# EAGLE board Main Board PCB v34 (EAGLE 9.7.0)
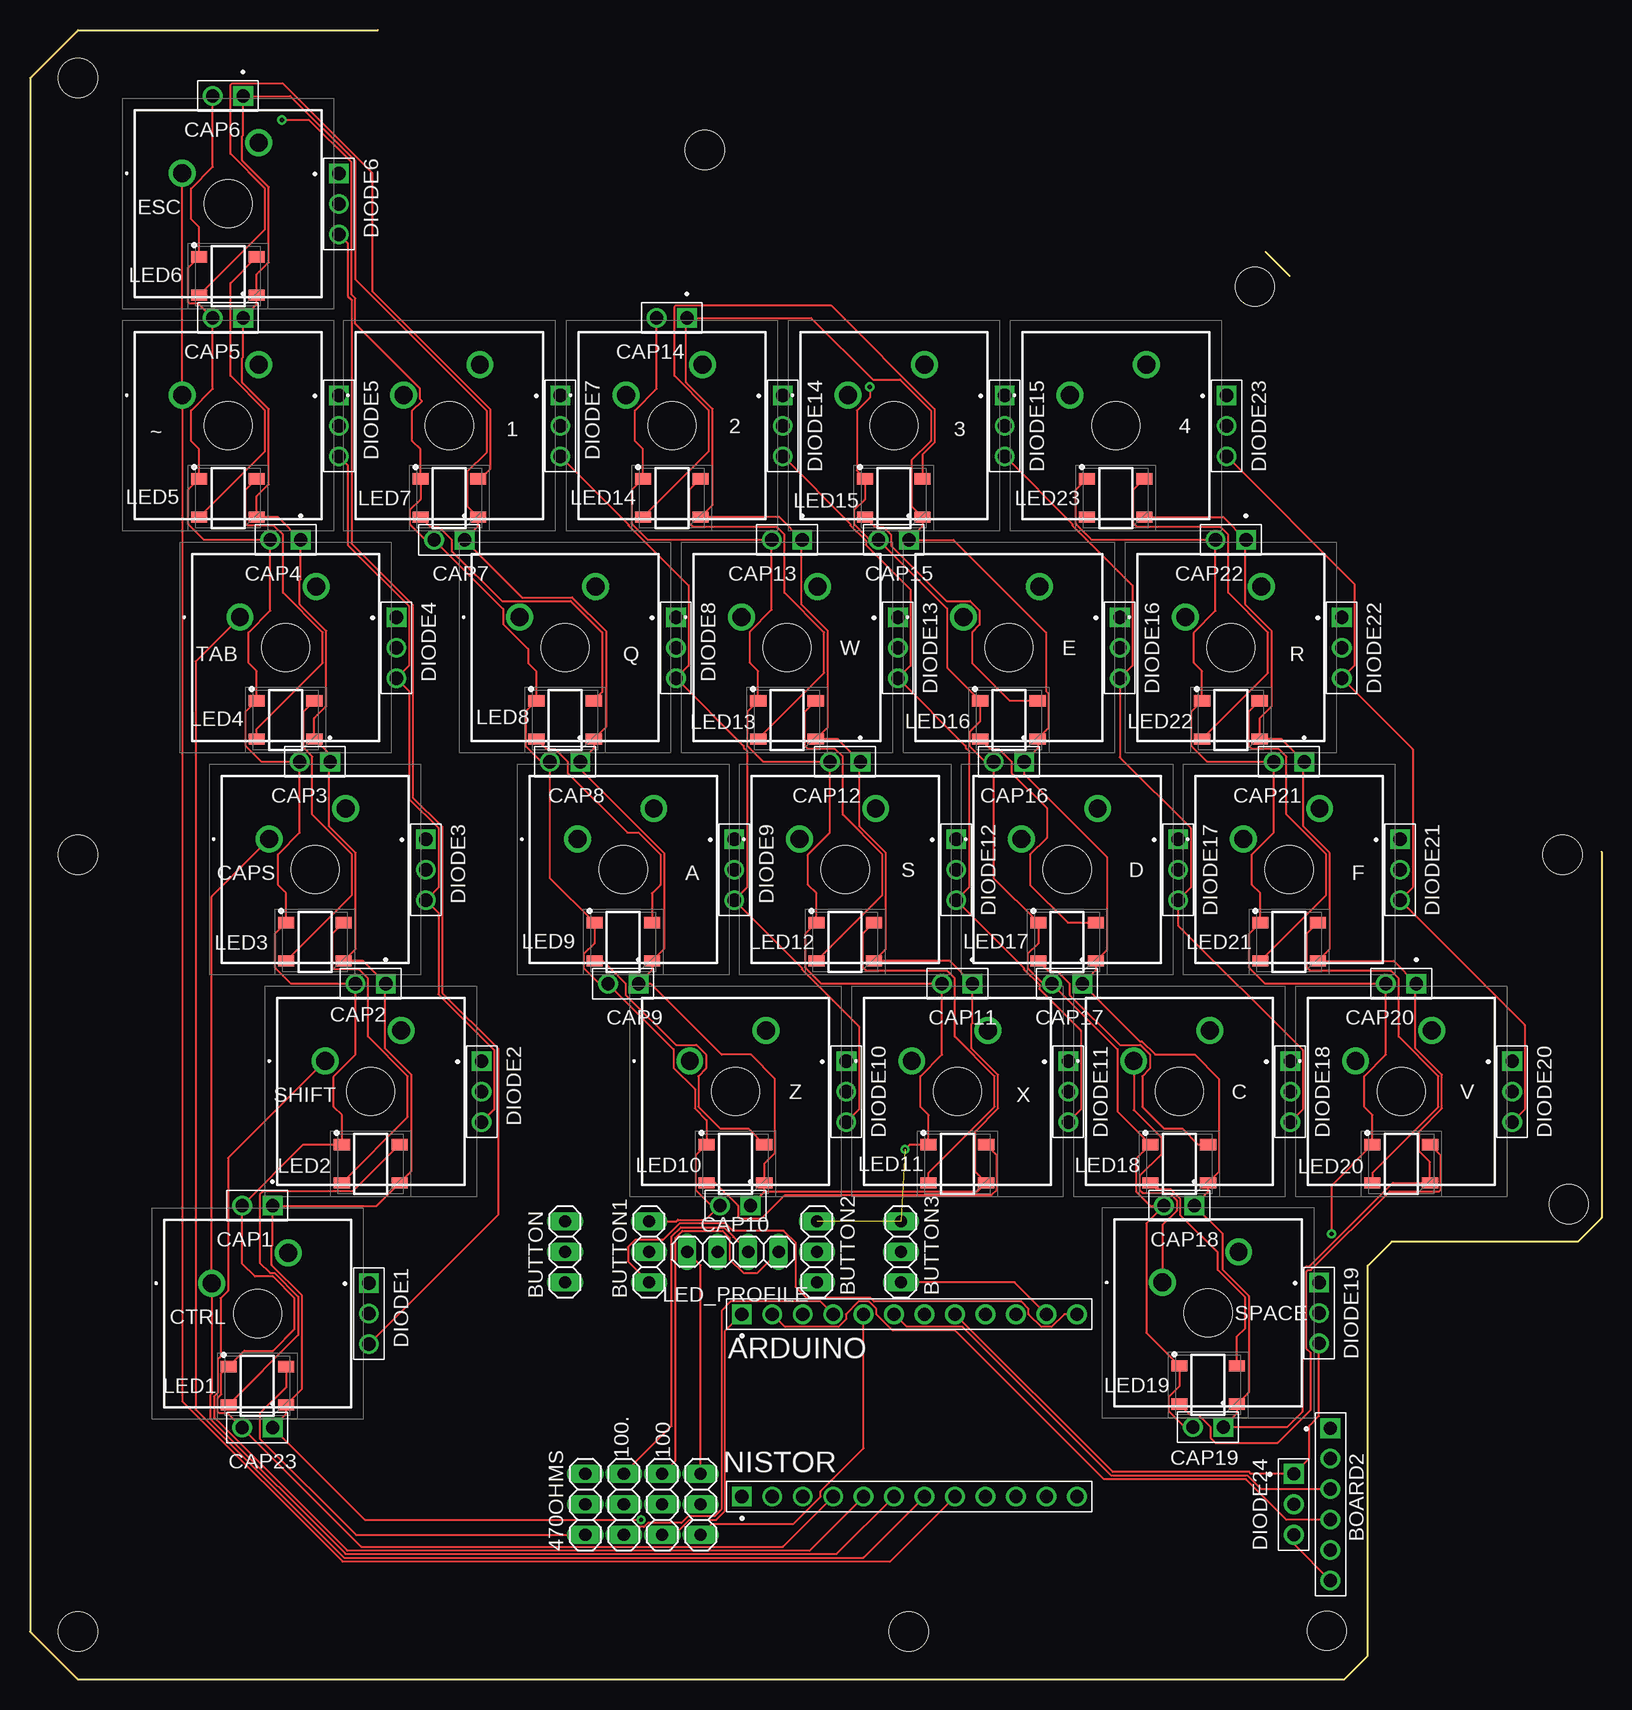
[diagram p0: board, top side]
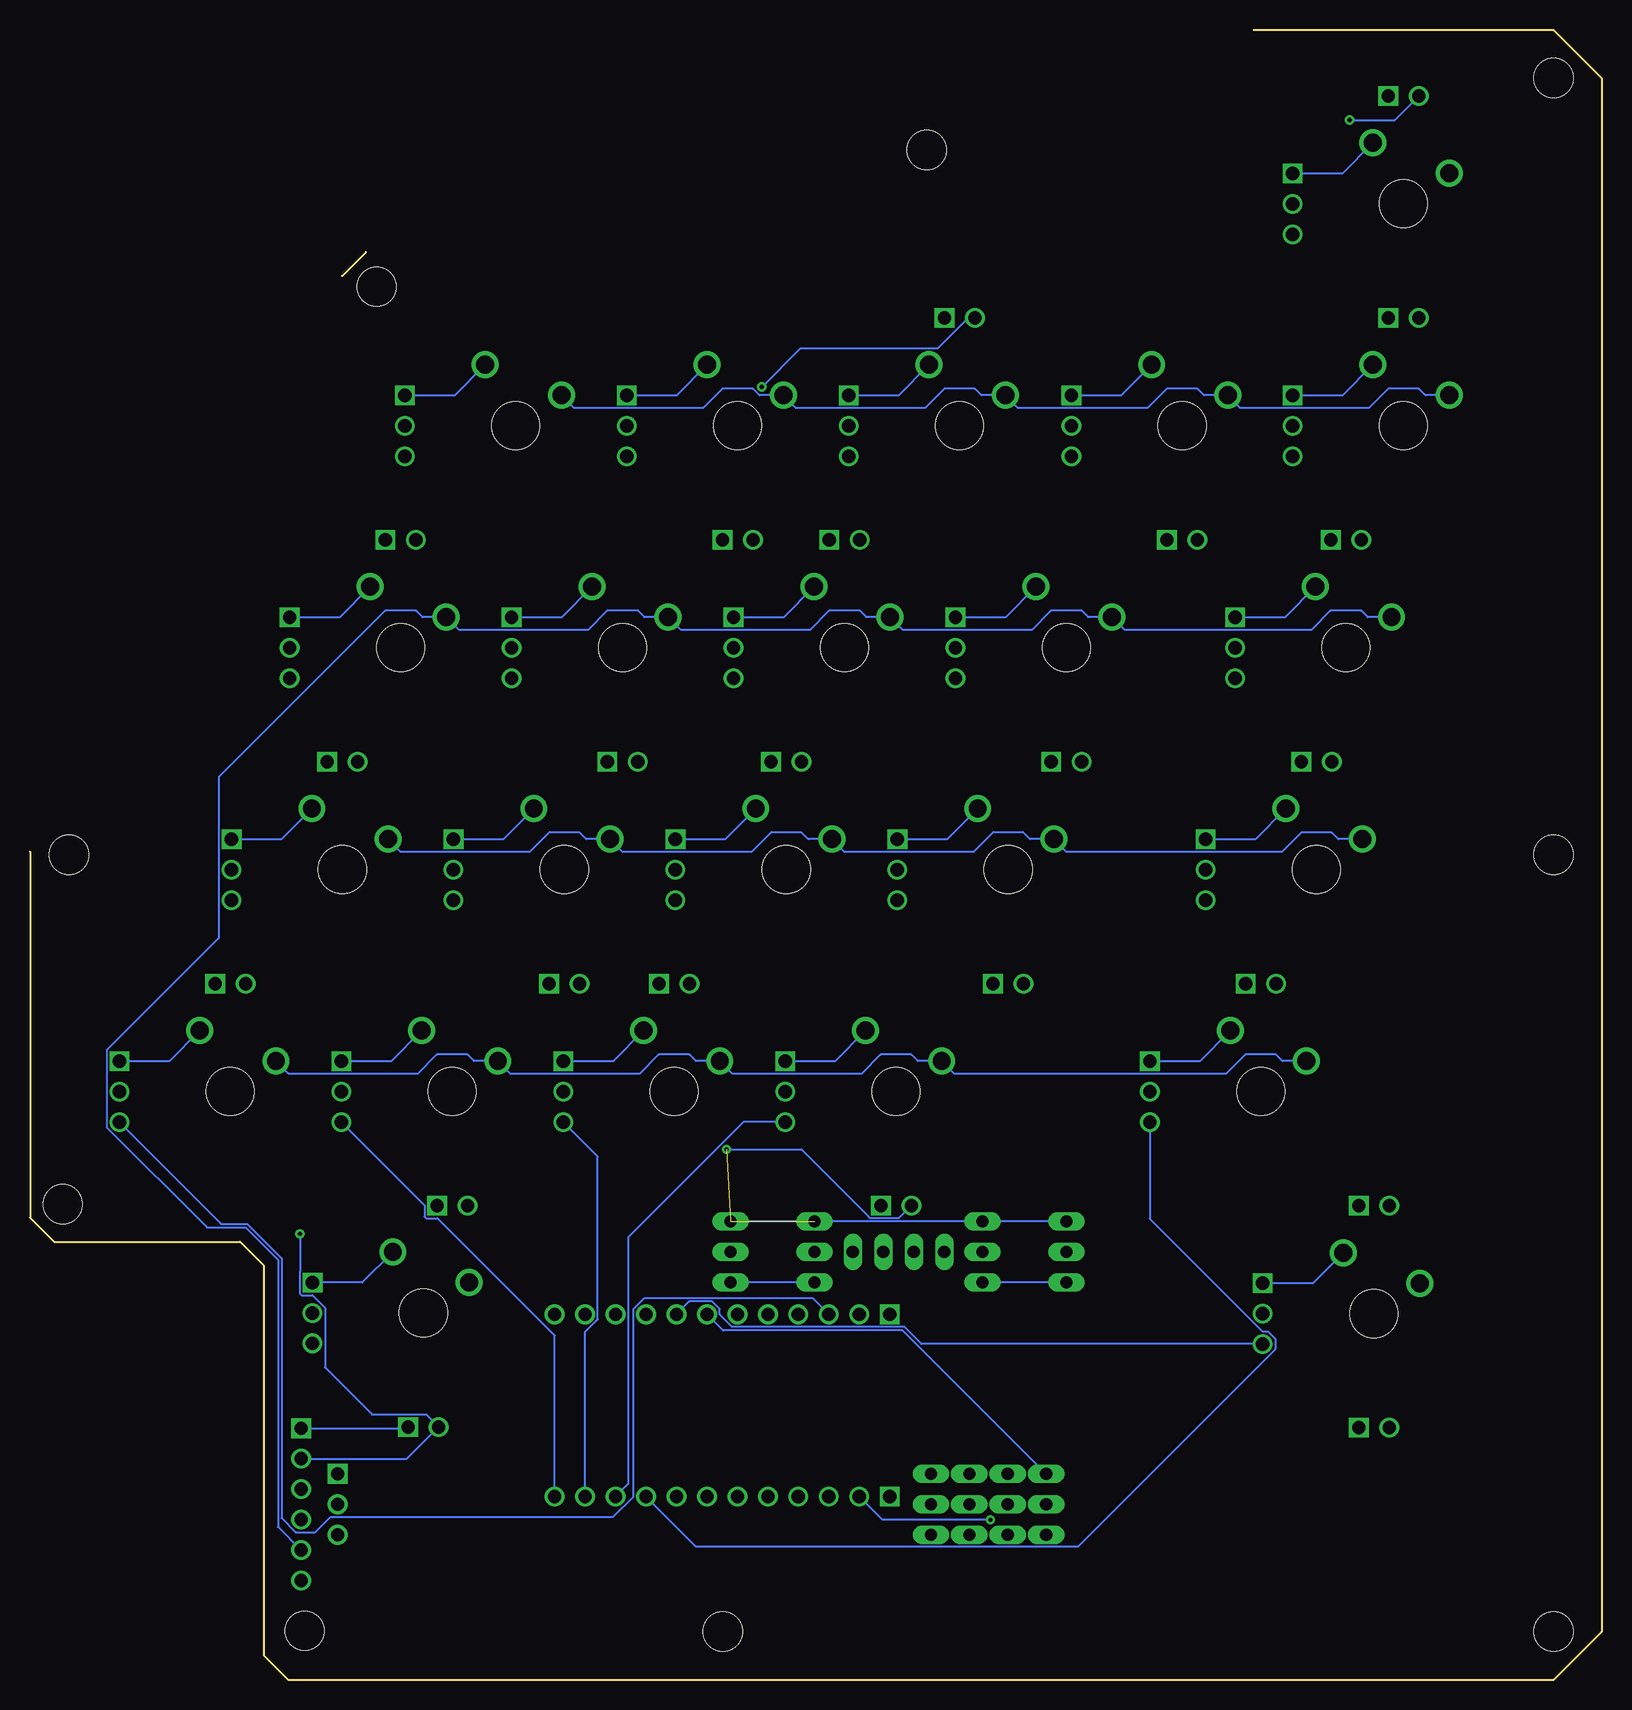
[diagram p1: board, bottom side, seen from below]

Size 131 x 137.5 mm. Coordinates in mm from the lower left corner, seen from the top.
Outline: 29,137.5 4,137.5 0,133.5 0,4 4,0 109.5,0 111.5,2 111.5,34.5 113.5,36.5 129,36.5 131,38.5 131,69
Outline: 105,117 103,119
Copper layers (1*16): Top / Bottom
Stack-up Default Layer Stack: Top User Defined 0.035mm / Dielectric-1 User Defined 1.5mm / Bottom User Defined 0.035mm
Design rules "default": minimum track width 6mil, minimum drill 0.35mm, track to track 6mil, track to pad 6mil, pad to pad 6mil, via to via 6mil, smd to smd 6mil, copper to edge 40mil, drill to drill 6mil, minimum pad ring 10mil, minimum via ring 8mil, stop-mask expansion 4mil, vias tented up to drill 0mil, thermal gap 10mil
Holes 3.25 mm at 4,4 4,133.5 102.1,116.1 73.25,4 4,68.75 127.75,68.75 56.25,127.5 128.28,39.63 108.1,4.05

## Footprints (pad centres in the part's own frame; a part is rotated, then mirrored left to right if it is on the bottom)
MX1AE1NW = drill 1.499 pad 2.248: 1 0,0; 2 6.35,2.54 | hole 3.988: 3.81,-2.54
1X03 = drill 1.016 long: 1 -2.54,0; 2 0,0; 3 2.54,0
61301211121 = drill 1.1 square: 1 -13.97,0 | drill 1.1: 2 -11.43,0; 3 -8.89,0; 4 -6.35,0; 5 -3.81,0; 6 -1.27,0; 7 1.27,0; 8 3.81,0; 9 6.35,0; 10 8.89,0; 11 11.43,0; 12 13.97,0
61300611121 = drill 1.1 square: 1 -6.35,0 | drill 1.1: 2 -3.81,0; 3 -1.27,0; 4 1.27,0; 5 3.81,0; 6 6.35,0
61300211121 = drill 1.1 square: 1 -1.27,0 | drill 1.1: 2 1.27,0
61300311121 = drill 1.1 square: 1 -2.54,0 | drill 1.1: 2 0,0; 3 2.54,0
WS2812B = smd 1.35 x 0.95: 1 -2.4,1.6; 2 -2.4,-1.6; 3 2.4,-1.6; 4 2.4,1.6
1X04 = drill 1.016 long: 1 -3.81,0; 2 -1.27,0; 3 1.27,0; 4 3.81,0

## Placement (x,y rotation side)
1  MX1A-E1NW  [MX1AE1NW]  31.15,107.05 0 top
2  MX1A-E1NW  [MX1AE1NW]  49.7,107.05 0 top
3  MX1A-E1NW  [MX1AE1NW]  68.2,107.05 0 top
4  MX1A-E1NW  [MX1AE1NW]  86.7,107.05 0 top
100  PINHD-1X3  [1X03]  52.7,14.6 90 top
100.  PINHD-1X3  [1X03]  49.5,14.6 90 top
150  PINHD-1X3  [1X03]  55.9,14.6 90 top
470OHMS  PINHD-1X3  [1X03]  46.3,14.6 90 top
A  MX1A-E1NW  [MX1AE1NW]  45.65,70.05 0 top
ARDUINO  61301211121  [61301211121]  73.3,30.45 0 top
BOARD2  61300611121  [61300611121]  108.4,14.6 270 top
BUTTON  PINHD-1X3  [1X03]  44.6,35.65 90 top
BUTTON1  PINHD-1X3  [1X03]  51.6,35.65 90 top
BUTTON2  PINHD-1X3  [1X03]  65.6,35.65 90 top
BUTTON3  PINHD-1X3  [1X03]  72.6,35.65 90 top
C  MX1A-E1NW  [MX1AE1NW]  92,51.55 0 top
CAP1  61300211121  [61300211121]  18.95,39.5 180 top
CAP2  61300211121  [61300211121]  28.4,58 180 top
CAP3  61300211121  [61300211121]  23.75,76.5 180 top
CAP4  61300211121  [61300211121]  21.3,95 180 top
CAP5  61300211121  [61300211121]  16.5,113.5 180 top
CAP6  61300211121  [61300211121]  16.5,132 180 top
CAP7  61300211121  [61300211121]  34.95,95 180 top
CAP8  61300211121  [61300211121]  44.6,76.5 180 top
CAP9  61300211121  [61300211121]  49.45,58 180 top
CAP10  61300211121  [61300211121]  58.8,39.5 180 top
CAP11  61300211121  [61300211121]  77.3,58 180 top
CAP12  61300211121  [61300211121]  67.95,76.5 180 top
CAP13  61300211121  [61300211121]  63.1,95 180 top
CAP14  61300211121  [61300211121]  53.5,113.5 180 top
CAP15  61300211121  [61300211121]  72,95 180 top
CAP16  61300211121  [61300211121]  81.6,76.5 180 top
CAP17  61300211121  [61300211121]  86.45,58 180 top
CAP18  61300211121  [61300211121]  95.8,39.5 180 top
CAP19  61300211121  [61300211121]  98.2,21.05 180 top
CAP20  61300211121  [61300211121]  114.3,58 180 top
CAP21  61300211121  [61300211121]  104.95,76.5 180 top
CAP22  61300211121  [61300211121]  100.1,95 180 top
CAP23  61300211121  [61300211121]  18.95,21 180 top
CAPS  MX1A-E1NW  [MX1AE1NW]  19.95,70.05 0 top
CTRL  MX1A-E1NW  [MX1AE1NW]  15.16,33.04 0 top
D  MX1A-E1NW  [MX1AE1NW]  82.65,70.05 0 top
DIODE1  61300311121  [61300311121]  28.25,30.5 270 top
DIODE2  61300311121  [61300311121]  37.65,49 270 top
DIODE3  61300311121  [61300311121]  33,67.5 270 top
DIODE4  61300311121  [61300311121]  30.55,86 270 top
DIODE5  61300311121  [61300311121]  25.75,104.5 270 top
DIODE6  61300311121  [61300311121]  25.75,123 270 top
DIODE7  61300311121  [61300311121]  44.2,104.5 270 top
DIODE8  61300311121  [61300311121]  53.85,86 270 top
DIODE9  61300311121  [61300311121]  58.7,67.5 270 top
DIODE10  61300311121  [61300311121]  68.05,49 270 top
DIODE11  61300311121  [61300311121]  86.55,49 270 top
DIODE12  61300311121  [61300311121]  77.2,67.5 270 top
DIODE13  61300311121  [61300311121]  72.35,86 270 top
DIODE14  61300311121  [61300311121]  62.75,104.5 270 top
DIODE15  61300311121  [61300311121]  81.25,104.5 270 top
DIODE16  61300311121  [61300311121]  90.85,86 270 top
DIODE17  61300311121  [61300311121]  95.7,67.5 270 top
DIODE18  61300311121  [61300311121]  105.05,49 270 top
DIODE19  61300311121  [61300311121]  107.45,30.55 270 top
DIODE20  61300311121  [61300311121]  123.55,49 270 top
DIODE21  61300311121  [61300311121]  114.2,67.5 270 top
DIODE22  61300311121  [61300311121]  109.35,86 270 top
DIODE23  61300311121  [61300311121]  99.75,104.5 270 top
DIODE24  61300311121  [61300311121]  105.35,14.6 270 top
E  MX1A-E1NW  [MX1AE1NW]  77.8,88.55 0 top
ESC  MX1A-E1NW  [MX1AE1NW]  12.7,125.55 0 top
F  MX1A-E1NW  [MX1AE1NW]  101.15,70.05 0 top
LED1  WS2812B  [WS2812B]  18.95,24.5 0 top
LED2  WS2812B  [WS2812B]  28.4,43 0 top
LED3  WS2812B  [WS2812B]  23.75,61.5 0 top
LED4  WS2812B  [WS2812B]  21.3,80 0 top
LED5  WS2812B  [WS2812B]  16.5,98.5 0 top
LED6  WS2812B  [WS2812B]  16.5,117 0 top
LED7  WS2812B  [WS2812B]  34.95,98.5 0 top
LED8  WS2812B  [WS2812B]  44.6,80 0 top
LED9  WS2812B  [WS2812B]  49.45,61.5 0 top
LED10  WS2812B  [WS2812B]  58.8,43 0 top
LED11  WS2812B  [WS2812B]  77.3,43 0 top
LED12  WS2812B  [WS2812B]  67.95,61.5 0 top
LED13  WS2812B  [WS2812B]  63.1,80 0 top
LED14  WS2812B  [WS2812B]  53.5,98.5 0 top
LED15  WS2812B  [WS2812B]  72,98.5 0 top
LED16  WS2812B  [WS2812B]  81.6,80 0 top
LED17  WS2812B  [WS2812B]  86.45,61.5 0 top
LED18  WS2812B  [WS2812B]  95.8,43 0 top
LED19  WS2812B  [WS2812B]  98.2,24.55 0 top
LED20  WS2812B  [WS2812B]  114.3,43 0 top
LED21  WS2812B  [WS2812B]  104.95,61.5 0 top
LED22  WS2812B  [WS2812B]  100.1,80 0 top
LED23  WS2812B  [WS2812B]  90.5,98.5 0 top
LED_PROFILE  PINHD-1X4  [1X04]  58.6,35.65 0 top
NISTOR  61301211121  [61301211121]  73.3,15.25 0 top
Q  MX1A-E1NW  [MX1AE1NW]  40.8,88.55 0 top
R  MX1A-E1NW  [MX1AE1NW]  96.3,88.55 0 top
S  MX1A-E1NW  [MX1AE1NW]  64.15,70.05 0 top
SHIFT  MX1A-E1NW  [MX1AE1NW]  24.6,51.55 0 top
SPACE  MX1A-E1NW  [MX1AE1NW]  94.4,33.1 0 top
TAB  MX1A-E1NW  [MX1AE1NW]  17.5,88.55 0 top
V  MX1A-E1NW  [MX1AE1NW]  110.5,51.55 0 top
W  MX1A-E1NW  [MX1AE1NW]  59.3,88.55 0 top
X  MX1A-E1NW  [MX1AE1NW]  73.5,51.55 0 top
Z  MX1A-E1NW  [MX1AE1NW]  55,51.55 0 top
~  MX1A-E1NW  [MX1AE1NW]  12.7,107.05 0 top

## Library data of the parts
1-4 A C CAPS CTRL D E ESC F Q R S SHIFT SPACE TAB V W X Z ~ = SamacSys_Parts; DESCRIPTION: Pushbutton Switches Full Travel, Mech. Keyswitch, Click Tactile Feel (Blue stem), 60cN, No LED, No Diode, Fixation Pins for PCB Mounting; HEIGHT: 15.2mm; MANUFACTURER_NAME: Cherry; MANUFACTURER_PART_NUMBER: MX1A-E1NW; MOUSER_PART_NUMBER: 540-MX1A-E1NW; MOUSER_PRICE-STOCK: https://www.mouser.co.uk/ProductDetail/CHERRY/MX1A-E1NW/?qs=Z7NFYKyvgJd45Wm4xzFv7w%3D%3D
100 100. 150 470OHMS BUTTON BUTTON1-BUTTON3 LED_PROFILE = Connector; CATEGORY: CONNECTOR; SUB-CATEGORY: PIN-HEADER
ARDUINO NISTOR = Headers; CREATED_BY: PCBLayout.com; DIGIKEY_PART_NUMBER: 732-5323-ND; MANUFACTURER: Wurth Electronics Inc.; MPN: 61301211121
BOARD2 = Headers; CREATED_BY: PCBLayout.com; DIGI_KEY_PART_NUMBER: 732-5319-ND; MANUFACTURER: Wurth Electronics Inc.; MPN: 61300611121
CAP1-CAP23 = Headers; CREATED_BY: PCBLayout.com; DIGI_KEY_PART_NUMBER: 732-5315-ND; MANUFACTURER: Wurth Electronics Inc.; MPN: 61300211121
DIODE1-DIODE24 = Headers; CREATED_BY: PCBLayout.com; DIGI_KEY_PART_NUMBER: 732-5316-ND; MANUFACTURER: Wurth Electronics Inc.; MPN: 61300311121
LED1-LED23 = WS2812B; DESCRIPTION: Intelligent control LED integrated light source; HEIGHT: mm; MANUFACTURER_NAME: Worldsemi; MANUFACTURER_PART_NUMBER: WS2812B

## Nets
N$1: DIODE5.1 ~.2
N$2: DIODE6.1 ESC.2
N$3: DIODE4.1 TAB.2
N$4: CAPS.2 DIODE3.1
N$5: DIODE2.1 SHIFT.2
N$6: CTRL.2 DIODE1.1
N$7: DIODE11.1 X.2
N$8: DIODE12.1 S.2
N$9: DIODE13.1 W.2
N$10: 2.2 DIODE14.1
N$11: 3.2 DIODE15.1
N$12: DIODE16.1 E.2
N$13: D.2 DIODE17.1
N$14: C.2 DIODE18.1
N$15: 4.2 DIODE23.1
N$16: DIODE22.1 R.2
N$17: DIODE21.1 F.2
N$18: DIODE20.1 V.2
N$19: DIODE19.1 SPACE.2
N$20: 470OHMS.1 LED1.4
N$21: A.1 CAPS.1 CTRL.1 D.1 F.1 NISTOR.6 S.1
N$22: BOARD2.5 E.1 NISTOR.7 Q.1 R.1 TAB.1 W.1
N$23: 1.1 2.1 3.1 4.1 ESC.1 NISTOR.8 ~.1
N$24: 470OHMS.3 ARDUINO.7
N$25: 1.2 DIODE7.1
N$26: DIODE8.1 Q.2
N$27: A.2 DIODE9.1
N$28: DIODE10.1 Z.2
N$29: DIODE7.3 DIODE8.3 DIODE9.3 DIODE10.3 NISTOR.10
N$30: DIODE11.3 DIODE12.3 DIODE13.3 DIODE14.3 NISTOR.11
N$31: DIODE15.3 DIODE16.3 DIODE17.3 DIODE18.3 NISTOR.12
N$32: ARDUINO.3 DIODE20.3 DIODE21.3 DIODE22.3 DIODE23.3
N$33: ARDUINO.8 DIODE1.3 DIODE6.3 DIODE19.3 DIODE24.1
N$34: ARDUINO.6 BOARD2.3
N$36: ARDUINO.2 BOARD2.4
N$37: BOARD2.6 DIODE24.3
N$38: 150.3 LED_PROFILE.1
N$39: ARDUINO.12 BUTTON1.1 BUTTON.1
N$40: 150.1 ARDUINO.5
N$41: BOARD2.2 BUTTON1.3 BUTTON2.3 BUTTON3.3 BUTTON.3 CAP1.2 CAP2.2 CAP3.2 CAP4.2 CAP5.2 CAP6.2 CAP7.2 CAP8.2 CAP9.2 CAP10.2 CAP11.2 CAP12.2 CAP13.2 CAP14.2 CAP15.2 CAP16.2 CAP17.2 CAP18.2 CAP19.2 CAP20.2 CAP21.2 CAP22.2 CAP23.2 LED1.1 LED2.1 LED3.1 LED4.1 LED5.1 LED6.1 LED7.1 LED8.1 LED9.1 LED10.1 LED11.1 LED12.1 LED13.1 LED14.1 LED15.1 LED16.1 LED17.1 LED18.1 LED19.1 LED20.1 LED21.1 LED22.1 LED23.1 NISTOR.4
N$42: 100..1 ARDUINO.4
N$43: BOARD2.1 CAP1.1 CAP2.1 CAP3.1 CAP4.1 CAP5.1 CAP6.1 CAP7.1 CAP8.1 CAP9.1 CAP10.1 CAP11.1 CAP12.1 CAP13.1 CAP14.1 CAP15.1 CAP16.1 CAP17.1 CAP18.1 CAP19.1 CAP20.1 CAP21.1 CAP22.1 CAP23.1 LED1.3 LED2.3 LED3.3 LED4.3 LED5.3 LED6.3 LED7.3 LED8.3 LED9.3 LED10.3 LED11.3 LED12.3 LED13.3 LED14.3 LED15.3 LED16.3 LED17.3 LED18.3 LED19.3 LED20.3 LED21.3 LED22.3 LED23.3 NISTOR.2
N$44: C.1 NISTOR.5 SHIFT.1 SPACE.1 V.1 X.1 Z.1
N$45: 100.1 ARDUINO.1
N$46: 100..3 LED_PROFILE.3
N$47: DIODE2.3 DIODE3.3 DIODE4.3 DIODE5.3 NISTOR.9
N$48: LED1.2 LED2.4
N$49: LED2.2 LED3.4
N$50: LED3.2 LED4.4
N$51: LED4.2 LED5.4
N$52: LED5.2 LED6.4
N$53: LED6.2 LED7.4
N$54: LED7.2 LED8.4
N$55: LED8.2 LED9.4
N$56: LED9.2 LED10.4
N$57: LED10.2 LED11.4
N$58: LED11.2 LED12.4
N$59: LED12.2 LED13.4
N$60: LED13.2 LED14.4
N$61: LED14.2 LED15.4
N$62: LED15.2 LED16.4
N$63: LED16.2 LED17.4
N$64: LED17.2 LED18.4
N$65: LED18.2 LED19.4
N$66: LED19.2 LED20.4
N$67: LED20.2 LED21.4
N$69: LED21.2 LED22.4
N$70: 100.3 LED_PROFILE.4
N$71: LED22.2 LED23.4
N$72: ARDUINO.11 BUTTON2.1 BUTTON3.1

## Tracks (layer width: path | path; a pad name or v marks a point on that pad's centre or on a via)
N$1
  Bottom 0.152: ~.2 21.6,107.04 DIODE5.1
N$2
  Bottom 0.152: ESC.2 21.6,125.54 DIODE6.1
N$3
  Bottom 0.152: TAB.2 26.4,88.54 DIODE4.1
N$4
  Bottom 0.152: CAPS.2 28.85,70.04 DIODE3.1
N$5
  Bottom 0.152: SHIFT.2 33.5,51.54 DIODE2.1
N$6
  Bottom 0.152: CTRL.2 24.05,33.04 DIODE1.1
N$7
  Bottom 0.152: X.2 82.4,51.54 DIODE11.1
N$8
  Bottom 0.152: S.2 73.05,70.04 DIODE12.1
N$9
  Bottom 0.152: W.2 68.2,88.54 DIODE13.1
N$10
  Bottom 0.152: 2.2 58.6,107.04 DIODE14.1
N$11
  Bottom 0.152: 3.2 77.1,107.04 DIODE15.1
N$12
  Bottom 0.152: E.2 86.7,88.54 DIODE16.1
N$13
  Bottom 0.152: D.2 91.55,70.04 DIODE17.1
N$14
  Bottom 0.152: C.2 100.9,51.54 DIODE18.1
N$15
  Bottom 0.152: 4.2 95.6,107.04 DIODE23.1
N$16
  Bottom 0.152: R.2 105.2,88.54 DIODE22.1
N$17
  Bottom 0.152: F.2 110.05,70.04 DIODE21.1
N$18
  Bottom 0.152: V.2 119.4,51.54 DIODE20.1
N$19
  Bottom 0.152: SPACE.2 103.3,33.09 DIODE19.1
N$20
  Top 0.152: LED1.4 21.35,24.37 19.17,22.19 19.17,20.08 27.19,12.06 470OHMS.1
N$21
  Top 0.152: CAPS.1 15.16,65.27 CTRL.1 15.16,23.85 15.04,23.72 15.04,21.72 26.3,10.46 67.24,10.46 NISTOR.6
  Bottom 0.152: CAPS.1 21.94,70.05 22.48,70.6 25.04,70.6 26.65,68.99 44.59,68.99 A.1 47.64,70.05 48.18,70.6 50.74,70.6 52.35,68.99 63.09,68.99 S.1 66.14,70.05 66.68,70.6 69.24,70.6 70.85,68.99 81.59,68.99 D.1 84.64,70.05 85.18,70.6 87.74,70.6 89.35,68.99 100.09,68.99 F.1
N$22
  Top 0.152: TAB.1 13.81,84.86 13.81,22.52 26.17,10.15 69.47,10.15 NISTOR.7
  Bottom 0.152: TAB.1 19.49,88.55 20.03,89.1 22.59,89.1 24.2,87.49 39.74,87.49 Q.1 42.79,88.55 43.33,89.1 45.89,89.1 47.5,87.49 58.24,87.49 W.1 61.29,88.55 61.83,89.1 64.39,89.1 66,87.49 76.74,87.49 E.1 79.79,88.55 80.33,89.1 82.89,89.1 84.5,87.49 95.24,87.49 R.1 98.29,88.55 98.83,89.1 101.39,89.1 115.25,75.23 115.25,61.81 124.6,52.46 124.6,46.02 116.25,37.67 113.02,37.67 110.33,34.98 110.33,12.72 BOARD2.5
N$23
  Top 0.152: ESC.1 ~.1 12.7,23.2 26.05,9.85 71.71,9.85 NISTOR.8
  Bottom 0.152: ~.1 14.69,107.05 15.23,107.6 17.79,107.6 19.4,105.99 30.09,105.99 1.1 33.14,107.05 33.68,107.6 36.24,107.6 37.85,105.99 48.64,105.99 2.1 51.69,107.05 52.23,107.6 54.79,107.6 56.4,105.99 67.14,105.99 3.1 70.19,107.05 70.73,107.6 73.29,107.6 74.9,105.99 85.64,105.99 4.1
N$24
  Bottom 0.152: 470OHMS.3 58.25,29.09 73.21,29.09 ARDUINO.7
N$25
  Bottom 0.152: 1.2 40.05,107.04 DIODE7.1
N$26
  Bottom 0.152: Q.2 49.7,88.54 DIODE8.1
N$27
  Bottom 0.152: A.2 54.55,70.04 DIODE9.1
N$28
  Bottom 0.152: Z.2 63.9,51.54 DIODE10.1
N$29
  Top 0.152: DIODE10.3 69.1,47.51 69.1,54.44 64.34,59.2 64.34,59.32 DIODE9.3 59.75,66.01 59.75,77.44 59.49,77.7 59.49,77.82 DIODE8.3 54.9,84.51 54.9,91.19 49.89,96.2 49.89,96.27 DIODE7.3
  Bottom 0.152: DIODE10.3 71.54,46.46 81.14,36.86 81.14,16.3 NISTOR.10
N$30
  Top 0.152: DIODE11.3 87.6,47.51 87.6,54.09 84.13,57.56 84.13,57.92 82.84,59.2 82.84,59.32 DIODE12.3 78.25,66.01 78.25,77.44 77.99,77.7 77.99,77.82 DIODE13.3 73.4,84.51 73.4,90.84 69.68,94.56 69.68,94.92 68.39,96.2 68.39,96.32 DIODE14.3
  Bottom 0.152: NISTOR.11 84.73,28.96 83.68,30.01 83.68,43.59 DIODE11.3
N$31
  Top 0.152: DIODE18.3 106.1,47.51 106.1,52.46 95.7,62.86 DIODE17.3 96.75,66.01 96.75,70.96 90.85,76.86 DIODE16.3 91.9,84.51 91.9,91.19 86.89,96.2 86.89,96.32 DIODE15.3
  Bottom 0.152: DIODE18.3 98.12,39.53 98.12,38.58 97.99,38.45 97.04,38.45 87.27,28.68 NISTOR.12
N$32
  Top 0.152: DIODE23.3 110.4,91.31 110.4,84.51 DIODE22.3 115.25,77.56 115.25,66.01 DIODE21.3 124.6,54.56 124.6,47.51 DIODE20.3
  Bottom 0.152: DIODE20.3 115.06,37.97 112.89,37.97 110.03,35.11 110.03,13.47 108.84,12.28 107.22,12.28 105.95,13.55 82.4,13.55 80.7,15.25 80.7,30.89 79.78,31.81 65.77,31.81 ARDUINO.3
N$33
  Top 0.152: DIODE1.3 39.01,38.72 39.01,52.59 34.36,57.24 34.36,71.09 31.91,73.54 31.91,89.59 26.8,94.69 26.8,115.02 26.5,115.32 26.5,119.71 DIODE6.3 | DIODE19.3 107.45,21.97 106.63,21.15 106.63,18.42 DIODE24.1 101.79,17.14 101.63,17.3 90.25,17.3 ARDUINO.8
  Bottom 0.152: DIODE1.3 56.69,27.96 58.12,29.4 72.47,29.4 73.52,30.45 73.52,30.89 74.13,31.5 76.06,31.5 ARDUINO.8
N$34
  Top 0.152: BOARD2.3 102.63,15.87 101.5,17 90.13,17 77.73,29.4 73.08,29.4 ARDUINO.6
N$36
  Top 0.152: ARDUINO.2 62.92,29.4 67.39,29.4 68,30.01 68,30.45 69.05,31.5 69.93,31.5 70.54,30.89 70.54,30.45 71.9,29.09 77.12,29.09 89.52,16.7 101.37,16.7 104.74,13.33 BOARD2.4
N$37
  Top 0.152: DIODE24.3 105.35,11.3 BOARD2.6
N$38
  Top 0.152: 150.3 55.9,34.54 LED_PROFILE.1
N$39
  Top 0.152: ARDUINO.12 86.22,30.45 85.17,29.4 84.29,29.4 83.24,30.45 83.24,30.89 82.63,31.5 70.36,31.5 70.05,31.81 64.74,31.81 63.85,32.7 63.85,36.38 62.82,37.4 58.6,37.4 57.99,38.01 54.13,38.01 52.76,36.64 50.43,36.64 49.85,36.06 49.85,34.86 BUTTON1.1
  Bottom 0.152: BUTTON.1 BUTTON1.1
N$40
  Top 0.152: 150.1 56.84,13 63.65,13 65.9,15.25 65.9,15.69 69.49,19.28 ARDUINO.5
N$41  (via drill 0.35)  (2 unrouted)
  Top 0.152: CAP6.2 15.23,126.09 13.42,124.29 13.42,121.73 14.1,121.06 LED6.1 13.2,117.7 13.2,114.83 13.33,114.7 14.03,114.7 CAP5.2 15.23,107.59 13.42,105.79 13.42,103.23 14.1,102.56 LED5.1 13.2,99.2 13.2,96.33 14.53,95 CAP4.2 20.03,89.09 18.22,87.29 18.22,84.73 18.9,84.06 LED4.1 18,80.7 18,77.83 19.33,76.5 CAP3.2 22.48,70.59 20.67,68.79 20.67,66.23 21.35,65.56 LED3.1 20.45,62.2 20.45,59.33 21.78,58 CAP2.2 27.13,52.09 25.32,50.29 25.32,47.73 26,47.06 LED2.1 22.78,44.6 CAP1.2 17.68,34.66 18.75,33.59 20.25,33.59 22.06,31.78 22.06,29.22 20.25,27.41 17.86,27.41 LED1.1 15.95,25.5 15.95,23.77 15.65,23.47 15.65,22.33 15.78,22.2 16.48,22.2 CAP23.2 27.61,11.07 62.77,11.07 NISTOR.4 | v21,130 23.26,130 26.8,126.46 26.8,115.45 27.11,115.14 27.11,113 32.5,107.61 32.5,106.75 32.67,106.58 31.87,105.79 31.87,103.23 32.55,102.56 LED7.1 32.55,98.37 31.65,97.47 31.65,96.33 32.98,95 CAP7.2 39.45,89.23 39.45,87.99 41.52,85.91 41.52,84.73 42.2,84.06 LED8.1 41.3,80.7 41.3,77.83 42.63,76.5 CAP8.2 43.33,66.82 LED9.1 47.05,61.37 46.15,60.47 46.15,59.33 47.48,58 CAP9.2 53.65,52.53 53.65,50.99 55.42,49.22 55.42,47.6 56.4,46.62 LED10.1 55.5,43.7 55.5,40.83 56.83,39.5 57.5,39.5 | 57.5,39.5 CAP10.2 | CAP14.2 52.23,107.59 50.42,105.79 50.42,103.23 51.1,102.56 LED14.1 50.2,99.2 50.2,96.33 51.53,95 CAP13.2 61.83,89.17 60.02,87.36 60.02,84.73 60.7,84.06 LED13.1 59.8,80.7 59.8,77.83 61.13,76.5 CAP12.2 66.68,70.59 64.87,68.79 64.87,66.23 65.55,65.56 LED12.1 64.65,62.2 64.65,59.33 65.98,58 CAP11.2 76.03,52.09 74.22,50.29 74.22,47.73 74.9,47.06 LED11.1 73.35,44.6 v72.95,44.2
  Top 0.152: v70,107.75 70,106.86 68.92,105.79 68.92,100.78 LED15.1 69.6,98.37 68.7,97.47 68.7,96.33 70.03,95 CAP15.2 76.45,89.28 76.45,84.35 LED16.1 79.2,79.87 78.3,78.97 78.3,77.83 79.63,76.5 CAP16.2 80.33,66.82 LED17.1 84.05,61.37 83.15,60.47 83.15,59.33 84.48,58 CAP17.2 90.65,52.53 90.65,47.35 LED18.1 92.19,43.39 92.19,40.7 93.4,39.5 CAP18.2 93.05,38.02 93.05,28.9 LED19.1 95.8,24.42 94.9,23.52 94.9,22.38 96.23,21.05 CAP19.2 | v108.5,37.15 108.5,41.2 LED20.1 111.9,47.06 111.22,47.73 111.22,50.29 113.03,52.09 CAP20.2 102.98,58 101.65,59.33 101.65,62.2 LED21.1 102.55,65.56 101.87,66.23 101.87,68.79 103.68,70.59 CAP21.2 98.13,76.5 96.8,77.83 96.8,80.7 LED22.1 97.7,84.06 97.02,84.73 97.02,87.29 98.83,89.09 CAP22.2 88.53,95 87.2,96.33 87.2,99.2 LED23.1 | BUTTON1.3 53.87,38.19 54,38.32 56.32,38.32 57.5,39.5
  Bottom 0.152: v21,130 17.23,130 CAP6.2 | CAP10.2 58.58,38.45 60.99,38.45 61.12,38.58 61.12,38.62 66.7,44.2 v72.95,44.2 | CAP14.2 52.8,113.5 55.35,110.94 66.81,110.94 v70,107.75 | v108.5,37.15 108.5,34.01 108.5,32.17 108.37,32.04 107.45,32.04 106.4,30.99 106.4,26 102.5,22.1 97.98,22.1 CAP19.2 | BUTTON.3 BUTTON3.3 | CAP19.2 | BOARD2.2 99.59,18.41 CAP19.2
N$42
  Top 0.152: ARDUINO.4 65.9,31.5 58.41,31.5 57.65,30.75 57.65,14.19 57.07,13.61 54.85,13.61 54.3,13.05 51.53,13.05 51.19,12.71 50.15,12.71 100..1
N$43  (via drill 0.35)
  Top 0.152: CAP3.1 24.95,76.43 24.95,71.12 27.15,68.92 27.15,60.9 LED3.3 27.77,59.9 CAP2.1 29.6,57.93 29.6,52.62 31.8,50.41 31.8,42.4 LED2.3 28.9,39.5 CAP1.1 20.22,36.2 20.16,36.14 20.16,34.54 22.67,32.03 22.67,24.22 LED1.3 21.35,22.13 CAP23.1 27.9,13.32 v50.93,13.32 | CAP3.1 | CAP3.1 25.01,77.09 LED4.3 23.7,80.13 24.7,81.13 24.7,87.42 22.5,89.62 22.5,91.65 22.57,91.72 CAP4.1 20.67,96.9 LED5.3 18.9,98.63 19.9,99.63 19.9,105.92 17.7,108.12 17.7,110.15 17.77,110.22 CAP5.1 18.9,114.63 LED6.3 18.9,117.13 19.9,118.13 19.9,124.42 17.7,126.62 17.7,128.65 17.77,128.72 CAP6.1 21.69,132 27.11,126.59 27.11,116.73 38.05,105.79 38.05,102.27 36.45,100.67 36.45,97.8 LED7.3 37.35,96.13 CAP7.1 41.01,90.21 45.21,90.21 48,87.42 48,79.4 LED8.3 47,77.63 CAP8.1 45.87,75.89 52.85,68.92 52.85,60.9 LED9.3 51.85,59.13 CAP9.1 51.75,58 57.65,52.1 60.09,52.1 62.1,50.08 62.1,43.9 61.2,43 LED10.3 61.2,40.63 CAP10.1 61.27,40.7 79,40.7 LED11.3 78.8,42.3 78.8,45.7 80.7,47.6 80.7,50.41 78.5,52.62 78.5,54.65 78.57,54.72 CAP11.1 76.67,59.9 LED12.3 71.35,60.9 71.35,68.92 69.15,71.12 69.15,76.43 CAP12.1 67.32,78.4 LED13.3 66.5,79.4 66.5,87.42 64.3,89.62 64.3,94.93 CAP13.1 62.47,96.9 LED14.3 56.9,97.9 56.9,105.92 54.7,108.12 54.7,113.43 CAP14.1 65.11,113.5 70.25,108.36 72.53,108.36 75.1,105.79 75.1,103.23 73.5,101.63 73.5,97.8 LED15.3 74.4,96.13 CAP15.1 76.98,95 84.7,87.29 84.7,82.38 84.9,82.17 84.9,79.3 LED16.3 84,77.63 CAP16.1 82.87,75.46 89.75,68.58 89.75,60.8 LED17.3 88.85,59.13 CAP17.1 92.51,53.21 92.69,53.21 93.8,52.1 97.09,52.1 99.1,50.08 99.1,42.3 LED18.3 98.2,40.63 CAP18.1 99.4,37.17 99.4,34.17 101.6,31.96 101.6,23.95 LED19.3 100.6,22.18 CAP19.1 104.8,21.05 106.09,22.34 106.09,34.14 106.4,34.45 106.66,34.45 113.61,41.4 LED20.3 116.7,43.13 115.8,44.03 115.8,45.7 117.7,47.6 117.7,50.41 115.5,52.62 115.5,57.93 CAP20.1 113.67,59.9 LED21.3 108.35,60.9 108.35,68.92 106.15,71.12 106.15,76.43 CAP21.1 104.32,78.4 LED22.3 102.5,80.13 103.5,81.13 103.5,87.42 101.3,89.62 101.3,94.93 CAP22.1 99.47,96.9 LED23.3
  Bottom 0.152: v50.93,13.32 59.94,13.32 NISTOR.2 | BOARD2.1 99.57,20.95 CAP19.1
N$44
  Top 0.152: C.1 92,47.47 94.3,45.17 94.3,43.78 92.5,41.97 92.5,40.83 92.77,40.55 94.97,40.55 95.58,39.94 95.58,39.06 94.4,37.88 SPACE.1 | SHIFT.1 16.52,43.47 16.52,32.41 15.89,31.78 15.89,26.91 15.65,26.67 15.65,23.9 15.34,23.6 15.34,21.85 26.43,10.77 65,10.77 NISTOR.5
  Bottom 0.152: SHIFT.1 26.59,51.55 27.13,52.1 29.69,52.1 31.3,50.49 53.94,50.49 Z.1 56.99,51.55 57.53,52.1 60.09,52.1 61.7,50.49 72.44,50.49 X.1 75.49,51.55 76.03,52.1 78.59,52.1 80.2,50.49 90.94,50.49 C.1 93.99,51.55 94.53,52.1 97.09,52.1 98.7,50.49 109.44,50.49 V.1
N$45
  Top 0.152: 100.1 53.74,12.06 54.98,13.3 57.2,13.3 57.96,14.06 57.96,29.08 ARDUINO.1
N$46
  Top 0.152: 100..3 53.49,21.14 53.49,36.95 54.25,37.71 57.87,37.71 58.62,36.95 58.62,36.9 LED_PROFILE.3
N$47
  Top 0.152: DIODE2.3 38.7,47.51 38.7,52.46 34.05,57.11 34.05,63.91 DIODE3.3 34.05,66.01 34.05,70.96 31.6,73.41 31.6,82.41 DIODE4.3 31.6,84.51 31.6,89.46 26.5,94.56 26.5,101.21 DIODE5.3
  Bottom 0.152: DIODE2.3 37.65,38.41 28.25,29.01 27.81,29.01 27.2,28.4 27.2,27.52 43.65,11.07 75.47,11.07 NISTOR.9
N$48
  Top 0.152: LED1.2 22.37,28.72 22.37,31.91 20.38,33.89 20,33.89 19.17,34.72 19.17,40.42 19.44,40.7 26.9,40.7 LED2.4
N$49
  Top 0.152: LED2.2 31.5,46.9 31.5,50.29 28.18,53.6 28.18,58.44 27.42,59.2 25.38,59.2 25.25,59.33 25.25,62.2 LED3.4
N$50
  Top 0.152: LED3.2 26.85,65.4 26.85,68.79 23.53,72.1 23.53,76.94 22.8,77.67 22.8,80.7 LED4.4
N$51
  Top 0.152: LED4.2 18.9,79.24 24.4,84.73 24.4,87.29 21.08,90.6 21.08,95.44 20.32,96.2 18.13,96.2 18,96.33 18,99.2 LED5.4
N$52
  Top 0.152: LED5.2 19.6,102.4 19.6,105.79 16.72,108.67 16.72,116.42 LED6.4
N$53
  Top 0.152: LED6.2 19.6,120.9 19.6,124.29 16.72,127.17 16.72,132.92 16.85,133.05 21.07,133.05 28.54,125.59 28.54,115.73 38.35,105.92 38.35,100.9 37.55,100.1 LED7.4
N$54
  Top 0.152: LED7.2 33.4,96.05 34.12,96.05 35.17,95 35.17,94.08 39.34,89.9 45.08,89.9 47.7,87.29 47.7,82.3 LED8.4
N$55
  Top 0.152: LED8.2 43.05,77.55 43.77,77.55 44.82,76.5 44.82,75.58 49.8,70.6 50.74,70.6 52.55,68.79 52.55,66.23 51.85,65.54 LED9.4
N$56
  Top 0.152: LED9.2 47.77,59.9 49.67,58 49.67,57.08 53.84,52.9 55.56,52.9 56.35,52.11 56.35,50.92 55.72,50.29 55.72,47.73 57.53,45.92 59.88,45.92 LED10.4
N$57
  Top 0.152: LED10.2 57.12,41.4 59.02,39.5 59.02,38.58 59.15,38.45 60.99,38.45 62.94,40.39 80.17,40.39 80.6,40.83 80.6,43.7 LED11.4
N$58
  Top 0.152: LED11.2 74.9,42.24 80.4,47.73 80.4,50.29 77.08,53.6 77.08,58.44 76.47,59.05 69.72,59.05 69.45,59.33 69.45,62.2 LED12.4
N$59
  Top 0.152: LED12.2 71.05,65.4 71.05,68.79 67.75,72.08 67.75,76.92 67.12,77.55 64.87,77.55 64.6,77.83 64.6,80.7 LED13.4
N$60
  Top 0.152: LED13.2 66.2,83.9 66.2,87.29 62.88,90.6 62.88,95.44 62.27,96.05 55.27,96.05 55,96.33 55,99.2 LED14.4
N$61
  Top 0.152: LED14.2 56.6,102.4 56.6,105.79 53.72,108.67 53.72,114.42 53.85,114.55 66.76,114.55 75.4,105.92 75.4,103.11 74.4,102.11 LED15.4
N$62
  Top 0.152: LED15.2 70.45,96.05 71.17,96.05 71.78,95.44 71.78,94.51 76.39,89.9 78.36,89.9 79.15,89.11 79.15,87.92 78.52,87.29 78.52,84.73 81.66,81.6 LED16.4
N$63
  Top 0.152: LED16.2 80.05,77.55 80.77,77.55 81.82,76.5 81.82,75.58 84.75,72.65 84.75,70.16 83.37,68.79 83.37,66.23 86.51,63.1 LED17.4
N$64
  Top 0.152: LED17.2 84.9,59.05 85.62,59.05 86.67,58 86.67,57.08 90.84,52.9 92.56,52.9 93.35,52.11 93.35,50.92 92.72,50.29 92.72,47.73 94.53,45.92 96.05,45.92 97.37,44.6 LED18.4
N$65
  Top 0.152: LED19.4 100.6,28.59 101.3,29.28 101.3,31.84 99,34.13 99,35.6 95.89,38.71 95.89,40.06 95.09,40.86 93.94,40.86 LED18.2
N$66
  Top 0.152: LED19.2 96.65,22.1 97.37,22.1 98.42,21.05 98.42,20.13 98.8,19.75 104,19.75 106.75,22.5 106.75,27.22 106.4,27.57 106.4,34.01 106.53,34.14 106.79,34.14 113.34,40.7 117.47,40.7 117.6,40.83 117.6,43.7 LED20.4
N$67
  Top 0.152: LED20.2 111.9,42.24 117.4,47.73 117.4,47.75 117.4,50.29 114.08,53.6 114.08,58.44 113.47,59.05 106.72,59.05 106.45,59.33 106.45,62.2 LED21.4
N$69
  Top 0.152: LED21.2 108.05,65.4 108.05,68.79 104.73,72.1 104.73,76.94 104.12,77.55 101.87,77.55 101.6,77.83 101.6,80.7 LED22.4
N$70
  Top 0.152: 100.3 53.8,18.24 53.8,36.82 54.38,37.4 57.74,37.4 58.32,36.82 58.32,35.04 59.46,33.9 60.66,33.9 LED_PROFILE.4
N$71
  Top 0.152: LED22.2 103.2,83.9 103.2,87.29 99.88,90.6 99.88,95.44 99.27,96.05 92.27,96.05 92,96.33 92,99.2 LED23.4
N$72
  Top 0.152: ARDUINO.11 82.07,33.11 BUTTON3.1
  Bottom 0.152: BUTTON2.1 BUTTON3.1 73.65,33.11